# Altium PCB PCB0.1.PcbDoc
Units mm, origin at the board's own origin, x right, y up, seen from the top; angles counter-clockwise.
Board outline 50 x 160 mm, 2 copper layers (Top Layer, Bottom Layer); 25 components, 108 nets, 297 pads, 31 vias.
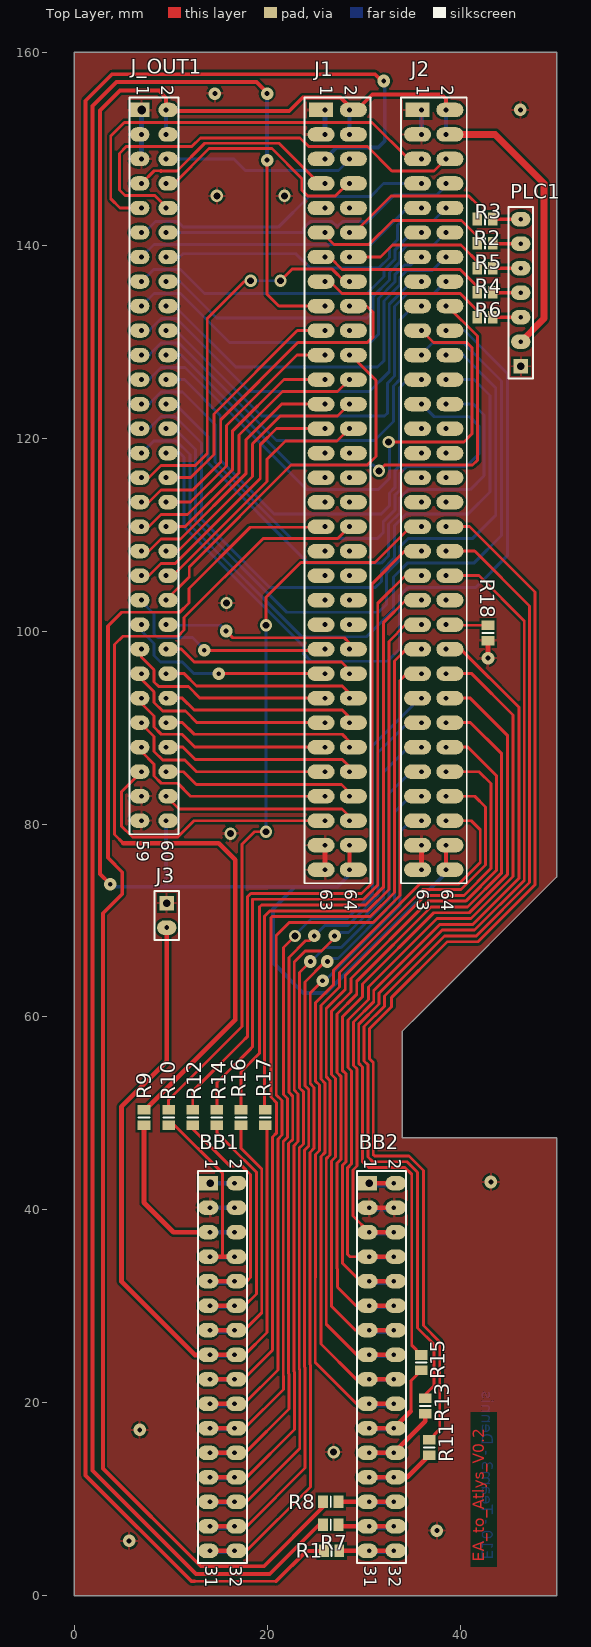
[diagram p0: Top Layer view]
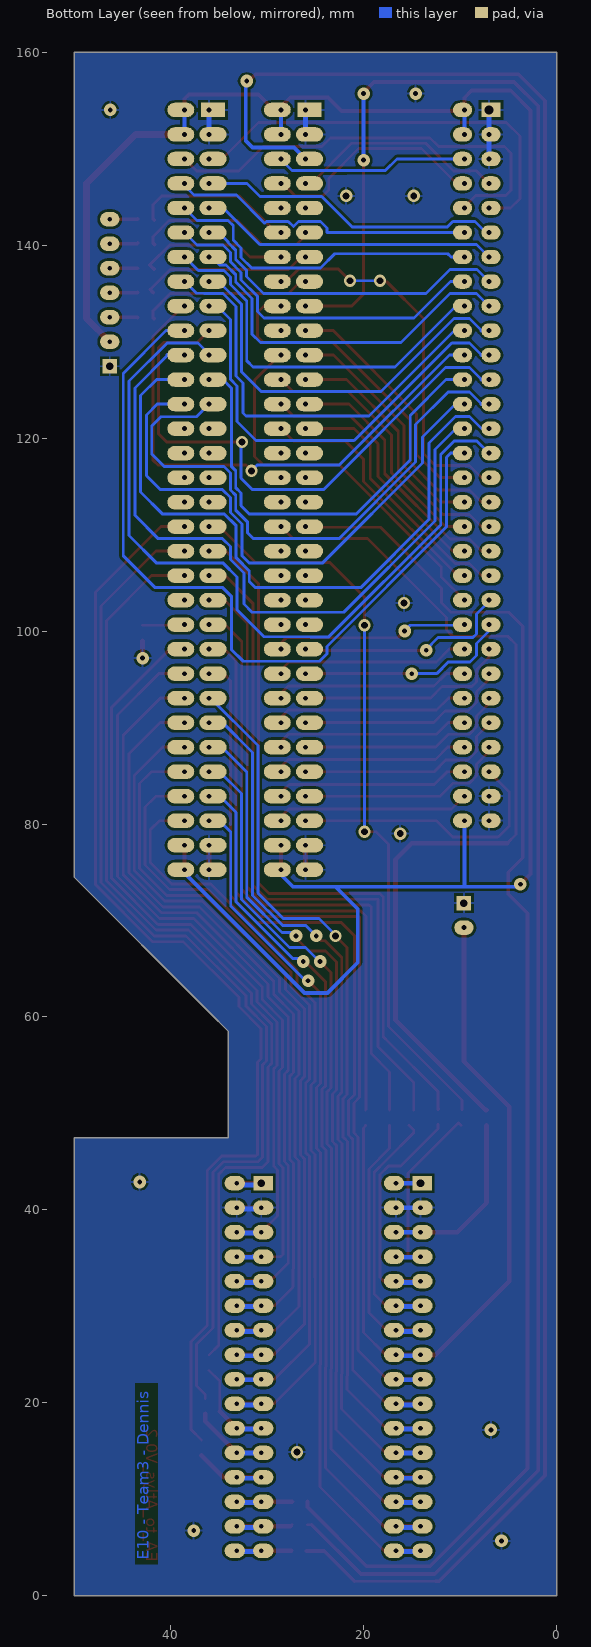
[diagram p1: Bottom Layer view, seen from below]

## Layer stack, top to bottom
Top Layer: signal copper 0.0356
Dielectric: dielectric 0.32, FR-4, Dk 4.8
Bottom Layer: signal copper 0.0356

## Board outline
0,0 0,160 50,160 50,74.5 36,60.5 34,58.5 34,47.5 50,47.5 50,0

## Design rules (kind name [scope] priority, off if disabled: settings)
Clearance Clearance_text [(InNet('GND') AND IsRegion) vs IsText] p1: gap=0
Clearance [All] p2: gap=0.254
PolygonConnect [All] p1: connectstyle=Relief reliefconductorwidth=0.254 reliefentries=4 polygonreliefangle="90 Angle"
RoutingVias [All] p1: holewidth=0.8 width=2 viastyle="Through Hole" minholewidth=0.711 minwidth=1.27 maxholewidth=0.711 maxwidth=1.27
SilkscreenOverComponentPads [All] p1: minsilkscreentomaskgap=0.254
SolderMaskExpansion [All] p1: expansion=0.102
Width Width_3V [InNet('+3V3')] p1: maxlimit=15 minlimit=0.4 preferedwidth=0.6 minimp=50.000000 maximp=50.000000 favimp=50.000000
Width Width_GND [InNet('GND')] p2: maxlimit=1.5 minlimit=0.5 preferedwidth=1 minimp=50.000000 maximp=50.000000 favimp=50.000000
Width [All] p3: maxlimit=1.5 minlimit=0.3 preferedwidth=0.5 minimp=50.000000 maximp=50.000000 favimp=50.000000
27 further rules are at their usual default settings.

## Components (designator, comment, footprint, x,y, rotation, side; value= is the part's Value field where it differs from the comment)
BB1 "Header 16X2" HDR2X16 14.1,42.775 r270 top
BB2 "Header 16X2" HDR2X16 30.6,42.775 r270 top
J1 "header 2x32" HDR2X32_special 26,154 r270 top
J2 "header 2x32" HDR2X32_special 36,154 r270 top
J3 "Header 2" HDR1X2 9.6,71.8 r270 top
J_OUT1 "Header 30X2" HDR2X30 7,154 r270 top
PLC1 "Header 7" HDR1X7 46.3,127.44 r90 top
R1 "Res1" 6-0805_L 26.7,4.675 r180 top
R2 "Res1" 6-0805_L 42.6,140.2 r180 top
R3 "Res1" 6-0805_L 42.6,142.7 r0 top
R4 "Res1" 6-0805_L 42.6,135.1 r180 top
R5 "Res1" 6-0805_L 42.6,137.6 r0 top
R6 "Res1" 6-0805_L 42.6,132.5 r180 top
R7 "Res1" 6-0805_L 26.6,7.375 r180 top
R8 "Res1" 6-0805_L 26.6,9.775 r180 top
R9 "Res1" 6-0805_L 7.25,49.575 r270 top
R10 "Res1" 6-0805_L 9.8,49.575 r90 top
R11 "Res1" 6-0805_L 36.8,15.375 r270 top
R12 "Res1" 6-0805_L 12.3,49.575 r90 top
R13 "Res1" 6-0805_L 36.4,19.675 r270 top
R14 "Res1" 6-0805_L 14.8,49.575 r90 top
R15 "Res1" 6-0805_L 36,24.175 r270 top
R16 "Res1" 6-0805_L 17.3,49.575 r90 top
R17 "Res1" 6-0805_L 19.8,49.575 r90 top
R18 "Res1" 6-0805_L 42.9,99.8 r270 top

## Footprints (in the part's own frame and the unit in brackets; to place one, negate y for a bottom-side part, rotate by r counter-clockwise, add the part's x,y. Pads: shape width x height; smd on the part's side, far side on the other; paste and mask are expansions set on the pad)
6-0805_L [mm] "Chip Resistor, Body 2.0x1.2mm, IPC High Density"
  rect 1x1.3 smd: 1(-0.8,0) 2(0.8,0)
  silkscreen extent 0,-0.55 0,0.55, body extent -1.07,-0.7 1.07,0.7, height 0.7
HDR1X2 [mm] "Connector; Header; 2 Position"
  rect 1.5x1.5 hole 0.8: 1(0,0)
  oval 1.5x2 hole 0.5: 2(2.54,0)
  silkscreen extent -1.27,-1.27 3.81,1.27
HDR1X7 [mm] "Connector; Header; 7 Position"
  rect 1.5x1.5 hole 0.8: 1(0,0)
  oval 1.5x2 hole 0.5: 2(2.54,0) 3(5.08,0) 4(7.62,0) 5(10.16,0) 6(12.7,0) 7(15.24,0)
  silkscreen extent -1.27,-1.27 16.51,1.27
HDR2X16 [mm] "Connector; Header; 16x2 Position"
  rect 1.5x2 hole 0.8 copper offset 0,-0.2: 1(0,0)
  oval 1.5x2.1 hole 0.5 copper offset 0,0.2: 2(0,2.54) 4(2.54,2.54) 6(5.08,2.54) 8(7.62,2.54) 10(10.16,2.54) 12(12.7,2.54) 14(15.24,2.54) 16(17.78,2.54) 18(20.32,2.54) 20(22.86,2.54) 22(25.4,2.54) 24(27.94,2.54) 26(30.48,2.54) 28(33.02,2.54) 30(35.56,2.54) 32(38.1,2.54)
  oval 1.5x2.1 hole 0.5 copper offset 0,-0.2: 3(2.54,0) 5(5.08,0) 7(7.62,0) 9(10.16,0) 11(12.7,0) 13(15.24,0) 15(17.78,0) 17(20.32,0) 19(22.86,0) 21(25.4,0) 23(27.94,0) 25(30.48,0) 27(33.02,0) 29(35.56,0) 31(38.1,0)
  silkscreen extent -1.27,-1.27 39.37,3.81
HDR2X30 [mm] "Connector; Header; 30x2 Position"
  rect 1.5x2 hole 0.9 copper offset 0,-0.2: 1(0,0)
  oval 1.5x2 hole 0.5 copper offset 0,0.2: 2(0,2.54) 4(2.54,2.54) 6(5.08,2.54) 8(7.62,2.54) 10(10.16,2.54) 12(12.7,2.54) 14(15.24,2.54) 16(17.78,2.54) 18(20.32,2.54) 20(22.86,2.54) 22(25.4,2.54) 24(27.94,2.54) 26(30.48,2.54) 28(33.02,2.54) 30(35.56,2.54) 32(38.1,2.54) 34(40.64,2.54) 36(43.18,2.54) 38(45.72,2.54) 40(48.26,2.54) 42(50.8,2.54) 44(53.34,2.54) 46(55.88,2.54) 48(58.42,2.54) 50(60.96,2.54) 52(63.5,2.54) 54(66.04,2.54) 56(68.58,2.54) 58(71.12,2.54) 60(73.66,2.54)
  oval 1.5x2 hole 0.5 copper offset 0,-0.2: 3(2.54,0) 5(5.08,0) 7(7.62,0) 9(10.16,0) 11(12.7,0) 13(15.24,0) 15(17.78,0) 17(20.32,0) 19(22.86,0) 21(25.4,0) 23(27.94,0) 25(30.48,0) 27(33.02,0) 29(35.56,0) 31(38.1,0) 33(40.64,0) 35(43.18,0) 37(45.72,0) 39(48.26,0) 41(50.8,0) 43(53.34,0) 45(55.88,0) 47(58.42,0) 49(60.96,0) 51(63.5,0) 53(66.04,0) 55(68.58,0) 57(71.12,0) 59(73.66,0)
  silkscreen extent -1.27,-1.27 75.06,3.81
HDR2X32_special [mm]
  rect 1.5x2.5 hole 0.5 copper offset 0,-0.4: 1(0,0)
  oval 1.5x2.8 hole 0.5 copper offset 0,0.4: 2(0,2.54) 4(2.54,2.54) 6(5.08,2.54) 8(7.62,2.54) 10(10.16,2.54) 12(12.7,2.54) 14(15.24,2.54) 16(17.78,2.54) 18(20.32,2.54) 20(22.86,2.54) 22(25.4,2.54) 24(27.94,2.54) 26(30.48,2.54) 28(33.02,2.54) 30(35.56,2.54) 32(38.1,2.54) 34(40.64,2.54) 36(43.18,2.54) 38(45.72,2.54) 40(48.26,2.54) 42(50.8,2.54) 44(53.34,2.54) 46(55.88,2.54) 48(58.42,2.54) 50(60.96,2.54) 52(63.5,2.54) 54(66.04,2.54) 56(68.58,2.54) 58(71.12,2.54) 60(73.66,2.54) 62(76.2,2.54) 64(78.74,2.54)
  oval 1.5x2.8 hole 0.5 copper offset 0,-0.4: 3(2.54,0) 5(5.08,0) 7(7.62,0) 9(10.16,0) 11(12.7,0) 13(15.24,0) 15(17.78,0) 17(20.32,0) 19(22.86,0) 21(25.4,0) 23(27.94,0) 25(30.48,0) 27(33.02,0) 29(35.56,0) 31(38.1,0) 33(40.64,0) 35(43.18,0) 37(45.72,0) 39(48.26,0) 41(50.8,0) 43(53.34,0) 45(55.88,0) 47(58.42,0) 49(60.96,0) 51(63.5,0) 53(66.04,0) 55(68.58,0) 57(71.12,0) 59(73.66,0) 61(76.2,0) 63(78.74,0)
  silkscreen extent -1.27,-2.1 80.14,4.7

## Part data
BB1 BB2: "Header, 16-Pin, Dual row"
J3: "Header, 2-Pin"
J_OUT1: "Header, 30-Pin, Dual row"
PLC1: "Header, 7-Pin"
R1 R2 R3 R4 R5 R6 R7 R8 R9 R10 R11 R12 R13 R14 R15 R16 R17 R18: "Resistor"

## Via types
v1: diameter 1.3, hole 0.5, Top Layer to Bottom Layer, 19 vias
v2: diameter 1.27, hole 0.711, Top Layer to Bottom Layer, 12 vias

## Nets (pads, with @x,y where several pads share a name; then routed paths per layer and width w, separated by ;. In a path a pad name is that pad's centre, name@x,y a point inside that pad or via, vN(x,y) a via of type N, cw(c..) or ccw(c..) an arc to the next point about the centre after c; other vN are vias at no path point)
+3V3: J1.2 J1.4 J1.62 J1.64 J2.2 J2.4 J2.62 J2.64 J_OUT1.2 J_OUT1.4 J_OUT1.60 PLC1.2 | length 231.5
  Top Layer w0.4: v1(3.75,73.75) 2.7,74.8 2.7,153.95 4.75,156 8.8,156 9.54,155.26 J_OUT1.2 9.64,153.9 22.3,153.9 23.7,155.3 27.6,155.3 28.54,154.36 J1.2 29.3,154 30.9,155.6 38.1,155.6 38.54,155.16 J2.2 ; J1.64 J1.62 ; J2.64 J2.62
  Top Layer w0.7: J2.4 43.64,151.46 48.7,146.4 48.7,132.38 PLC1.2
  Bottom Layer w0.4: v1(3.75,73.75) 4,73.5 9.5,73.5 ; J_OUT1.60 9.54,73.54 9.5,73.5 ; J_OUT1.4 J_OUT1.2 ; 22.85,73.45 20.6,71.2 20.6,65.65 23.75,62.5 26.105,62.5 38.54,74.935 J2.64 ; 27.302,73.5 9.5,73.5 ; 27.302,73.502 28.54,74.74 J1.64 28.51,75.26 J1.64@28.07,74.82 ; J1.4 J1.2 ; J2.4 J2.2
A1: BB1.13 BB1.14 R16.1 | length 28.5
  Top Layer w0.3: BB1.14 17.635,27.535 19.446,29.346 19.446,44.254 17.3,46.4 R16.1
  Top Layer w0.5: BB1.13 BB1.14
  Bottom Layer w0.5: BB1.13 14.365,27.535 14.5,27.4 16,27.4 BB1.14@16.1,27.3
A2: BB2.21 BB2.22 R15.2 | length 11.6
  Top Layer w0.3: 34.9,19.135 34.9,22.275 R15.2
  Top Layer w0.5: BB2.21 BB2.22 34.9,19.135
  Bottom Layer w0.5: BB2.21 30.925,17.375 31,17.3 BB2.22@32.465,17.3
A3: BB1.11 BB1.12 R14.1 | length 26.4
  Top Layer w0.3: R14.1@15.3,48.775 14.8,48.275 14.8,48 17.625,45.175 17.634,45.175 18.892,43.917 18.892,31.292 17.675,30.075 BB1.12
  Top Layer w0.5: BB1.11 BB1.12
  Bottom Layer w0.5: BB1.11@14.7,30 15.965,30 BB1.12@16.265,29.7
A4: BB2.23 BB2.24 R13.2 | length 9.7
  Top Layer w0.5: BB2.23 BB2.24 36.4,18.095 R13.2
  Bottom Layer w0.5: BB2.23 30.765,14.835 30.8,14.8 BB2.24@32.405,14.8
A5: BB1.9 BB1.10 R12.1 | length 25.4
  Top Layer w0.3: R12.1@12.3,48.901 R12.1 12.3,48.4 16.125,44.575 17.386,44.575 18.3,43.661 18.3,33 17.915,32.615 BB1.10
  Top Layer w0.5: BB1.9 BB1.10
  Bottom Layer w0.5: BB1.9 14.585,32.615 14.7,32.5 BB1.10@15.925,32.5
A6: BB2.25 BB2.26 R11.2 | length 9.1
  Top Layer w0.5: BB2.25 BB2.26 34.52,12.295 R11.2
  Bottom Layer w0.5: BB2.25 30.905,12.295 31,12.2 BB2.26@32.545,12.2
A7: BB1.7 BB1.8 R10.1 | length 21
  Top Layer w0.3: R10.1@9.9,48.775 10.163,49.037 15.4,43.8 15.386,43.786 15.386,35.155 ; BB1.8 BB1.8@16.98,35.155
  Top Layer w0.5: BB1.7 BB1.8
  Bottom Layer w0.5: BB1.7@14.6,35.1 16.1,35.1 BB1.8@16.2,35
ABUF_EN: J2.44 R18.1 | length 4.4
  Top Layer w0.3: J2.44 38.6,100.6 R18.1
CS2: BB1.15 BB1.16 J3.2 R17.1 | length 81.1
  Top Layer w0.3: BB1.15@14.08,24.975 BB1.15 ; BB1.16 17.695,24.995 20,27.3 20,48.5 19.8,48.7 R17.1
  Top Layer w0.5: J3.2 9.6,55.4 4.9,50.7 4.9,32.6 12.525,24.975 BB1.15@14.08,24.975 ; BB1.15 BB1.16
  Bottom Layer w0.5: BB1.15@14.6,24.9 BB1.16@16.345,24.9
D0: BB2.19 BB2.20 J2.60 | length 80.8
  Top Layer w0.3: BB2.19 29.285,19.915 25,24.2 25,32.998 25.03,33.028 25.03,45.762 25.432,46.164 25.432,52.936 25.03,53.338 25.03,61.476 26.9,63.346 26.9,64.849 35.851,73.8 39.9,73.8 42.1,76 42.1,79.4 41.16,80.34 J2.60
  Top Layer w0.5: BB2.19 BB2.20
  Bottom Layer w0.5: BB2.19 30.715,19.8 BB2.20@32.525,19.8
D1: BB1.31 BB1.32 J2.59 | length 90.6
  Top Layer w0.3: BB1.32 17.875,4.675 24.5,11.3 24.5,23.917 24.446,23.971 24.446,45.962 24.878,46.394 24.878,52.706 24.476,53.108 24.476,62.476 v1(25.75,63.75)
  Top Layer w0.5: BB1.31 BB1.32
  Bottom Layer w0.3: v1(25.75,63.75) 26,63.75 33.762,71.512 33.762,79.162 34.94,80.34 J2.59
  Bottom Layer w0.5: BB1.31 14.175,4.6 16.5,4.6 BB1.32@16.575,4.675
D2: BB2.17 BB2.18 J2.58 | length 81.4
  Top Layer w0.3: BB2.17 29.245,22.455 25.584,26.116 25.584,45.533 25.986,45.935 25.986,53.165 25.584,53.567 25.584,61.181 27.5,63.097 27.5,64.6 36.1,73.2 40.1,73.2 42.654,75.754 42.654,81.746 41.52,82.88 J2.58
  Top Layer w0.5: BB2.17 BB2.18
  Bottom Layer w0.5: BB2.17 31.145,22.455 31.2,22.4 32.685,22.4 BB2.18@32.885,22.2
D3: BB1.29 BB1.30 J2.57 | length 90.2
  Top Layer w0.3: BB1.30 17.915,7.215 23.946,13.246 23.946,23.687 23.892,23.741 23.892,46.191 24.324,46.623 24.324,52.477 23.922,52.879 23.922,63.638 26.034,65.75 v1(26.25,65.75)
  Top Layer w0.5: BB1.29 BB1.30
  Bottom Layer w0.3: v1@26.325,66.075 27.342,66.075 33.208,71.941 33.208,81.208 34.88,82.88 J2.57
  Bottom Layer w0.5: BB1.29 14.215,7.1 BB1.30@15.925,7.1
D4: BB2.15 BB2.16 J2.56 | length 81.3
  Top Layer w0.3: BB2.15 29.305,24.995 26.138,28.162 26.138,45.303 26.54,45.705 26.54,53.395 26.138,53.797 26.138,60.887 28.1,62.849 28.1,64.3 36.4,72.6 40.4,72.6 43.208,75.408 43.208,84.192 41.98,85.42 J2.56 ; BB2.16 BB2.16@33.22,24.995
  Top Layer w0.5: BB2.15 BB2.16
  Bottom Layer w0.5: BB2.15 30.905,24.995 31,24.9 BB2.16@32.545,24.9
D5: BB1.27 BB1.28 J2.55 | length 91.4
  Top Layer w0.3: BB1.28 17.855,9.755 23.392,15.292 23.392,23.458 23.338,23.512 23.338,46.421 23.77,46.853 23.77,52.247 23.368,52.649 23.368,64.618 v1(24.5,65.75)
  Top Layer w0.5: BB1.27 BB1.28
  Bottom Layer w0.3: v1(24.5,65.75) 24.55,65.75 26,67.2 27.683,67.2 32.654,72.171 32.654,83.154 34.92,85.42 J2.55
  Bottom Layer w0.5: BB1.27 14.245,9.755 14.3,9.7 16.185,9.7 BB1.28@16.385,9.5
D6: BB2.13 BB2.14 J2.54 | length 80.7
  Top Layer w0.3: BB2.13 29.165,27.535 26.7,30 26.7,33.708 26.692,33.716 26.692,45.074 27.094,45.476 27.094,53.624 26.692,54.026 26.692,60.592 28.7,62.6 28.7,64 36.7,72 40.583,72 43.762,75.179 43.762,85.038 40.84,87.96 J2.54
  Top Layer w0.5: BB2.13 BB2.14
  Bottom Layer w0.5: BB2.13 30.735,27.4 BB2.14@32.605,27.4
D7: BB1.25 BB1.26 J2.53 | length 92.3
  Top Layer w0.3: BB1.26 17.895,12.295 22.838,17.238 22.838,23.228 22.784,23.282 22.784,46.65 23.216,47.082 23.216,52.018 22.814,52.42 22.814,65.714 23.949,66.849 25.649,66.849 27,68.2 v1(27,68.4)
  Top Layer w0.5: BB1.25 BB1.26
  Bottom Layer w0.3: v1(27,68.4) 27.35,68.75 28.45,68.75 32.1,72.4 32.1,85.4 34.66,87.96 J2.53
  Bottom Layer w0.5: BB1.25 14.1,12.1 14.2,12.2 15.945,12.2 BB1.26@16.245,11.9
D8: BB2.11 BB2.12 J2.52 | length 81.9
  Top Layer w0.3: BB2.11 29.225,30.075 27.3,32 27.3,33.892 27.246,33.946 27.246,44.844 27.648,45.246 27.648,53.854 27.246,54.256 27.246,60.295 29.3,62.349 29.3,63.7 37,71.4 40.767,71.4 44.316,74.949 44.316,87.284 41.1,90.5 J2.52 J2.52@38.54,90.36 ; BB2.12 33.2,30.135 BB2.12@33.2,30.675
  Top Layer w0.5: BB2.11 BB2.12
  Bottom Layer w0.5: BB2.11 31.125,30.075 31.125,30 32.815,30 BB2.12@32.94,29.875
D9: BB1.23 BB1.24 J2.51 | length 92.2
  Top Layer w0.3: BB1.24 17.735,14.835 22.284,19.384 22.284,22.999 22.23,23.053 22.23,46.88 22.662,47.312 22.662,51.788 22.26,52.19 22.26,66.16 24,67.9 24.4,67.9 v1(24.9,68.4)
  Top Layer w0.5: BB1.23 BB1.24
  Bottom Layer w0.3: v1(24.9,68.4) 26,69.5 28.4,69.5 31.5,72.6 31.5,87.4 34.6,90.5 J2.51
  Bottom Layer w0.5: BB1.23 14.1,14.7 14.2,14.8 16.005,14.8 BB1.24@16.305,14.5
D10: BB2.9 BB2.10 J2.50 | length 80.4
  Top Layer w0.3: BB2.9 29.685,32.615 27.8,34.5 27.8,44.615 28.202,45.017 28.202,54.083 27.8,54.485 27.8,60 29.9,62.1 29.9,63.419 37.281,70.8 40.95,70.8 44.9,74.75 44.9,89.2 41.06,93.04 J2.50
  Top Layer w0.5: BB2.9 BB2.10
  Bottom Layer w0.5: BB2.9 31.085,32.615 31.2,32.5 BB2.10@32.625,32.5
D11: BB1.21 BB1.22 J2.49 | length 90.9
  Top Layer w0.3: BB1.22 17.675,17.375 21.7,21.4 21.7,22.799 21.676,22.823 21.676,47.109 22.108,47.541 22.108,51.559 21.7,51.967 21.7,67.2 v2(22.9,68.4)
  Top Layer w0.5: BB1.21 BB1.22
  Bottom Layer w0.3: v2@22.85,68.45 24.6,70.2 28.317,70.2 30.946,72.829 30.946,88.128 35.858,93.04 J2.49
  Bottom Layer w0.5: BB1.21@14.7,17.3 BB1.22@16.165,17.3
D12: BB2.7 BB2.8 J2.48 | length 81.4
  Top Layer w0.3: BB2.7 28.599,35.155 28.354,35.4 28.354,44.385 28.756,44.787 28.756,54.398 28.4,54.754 28.4,59.7 30.5,61.8 30.5,63.1 37.6,70.2 41.134,70.2 45.5,74.566 45.5,91.3 41.22,95.58 J2.48
  Top Layer w0.5: BB2.7 BB2.8
  Bottom Layer w0.5: BB2.7 31.445,35.155 31.5,35.1 32.685,35.1 BB2.8@32.885,34.9
D13: BB1.19 BB1.20 J2.47 | length 95
  Top Layer w0.3: BB1.20 16.7,19.975 17.675,19.975 21.122,23.422 21.122,47.339 21.554,47.771 21.554,51.329 20.954,51.929 20.954,68.454 22.3,69.8 31,69.8 33.775,72.575 33.775,94.875 34.48,95.58 J2.47
  Top Layer w0.5: BB1.19 BB1.20
  Bottom Layer w0.5: BB1.19 14.485,19.915 14.6,19.8 BB1.20@15.8,19.8
D14: BB2.5 BB2.6 J2.46 | length 79.5
  Top Layer w0.3: BB2.5 28.908,39.387 28.908,44.156 29.31,44.558 29.31,54.627 28.954,54.983 28.954,59.471 31.054,61.571 31.054,62.754 37.9,69.6 41.317,69.6 46.1,74.383 46.1,92.1 40.08,98.12 J2.46
  Top Layer w0.5: BB2.5 BB2.6
  Bottom Layer w0.5: BB2.5 31.205,37.695 31.3,37.6 32.645,37.6 BB2.6@32.845,37.4
D15: BB1.17 BB1.18 J2.45 | length 95.9
  Top Layer w0.3: BB1.18 17.555,22.455 20.568,25.468 20.568,47.568 21,48 21,51.1 20.4,51.7 20.4,70.3 20.5,70.4 30.7,70.4 33.2,72.9 33.2,96.9 34.42,98.12 J2.45
  Top Layer w0.5: BB1.17 BB1.18
  Bottom Layer w0.5: BB1.17@14.7,22.3 14.8,22.4 15.985,22.4 BB1.18@16.285,22.1
DBUS_EN: J2.43 R17.2 | length 63.9
  Top Layer w0.3: 19.746,51.429 19.754,51.437 19.754,70.454 20.3,71 30.4,71 32.625,73.225 32.625,98.925 34.36,100.66 J2.43 ; 19.75,51.425 19.75,50.425 R17.2
GND: BB1.3 BB1.4 BB2.3 BB2.4 J1.1 J1.3 J1.61 J1.63 J2.1 J2.3 J2.61 J2.63 J3.1 J_OUT1.1 J_OUT1.3 J_OUT1.5 J_OUT1.57 J_OUT1.59 PLC1.1 R18.2 | length 24.9
  Top Layer w0.5: J1.63 J1.61 ; BB2.3 BB2.4 ; J2.63 J2.61 ; v1@42.9,96.8 R18.2
  Bottom Layer w0.5: J_OUT1.5 J_OUT1.3 J_OUT1.1 ; BB1.3 BB1.4 ; J1.3 J1.1 ; BB2.3 31.165,40.235 31.3,40.1 32.605,40.1 BB2.4@32.805,39.9 ; J2.3 J2.1
  other v1: 5.7,5.7 37.6,6.775 6.8,17.2 43.2,42.9 42.9,97.2 46.25,154 14.6,155.7
  other v2: 26.9,14.9 16.2,79 15.8,102.9 14.8,145.1 21.8,145.1
HDI: PLC1.6 R2.1 | length 2.9
  Top Layer w0.4: R2.1 43.46,140.14 PLC1.6
HDO: PLC1.7 R3.2 | length 2.9
  Top Layer w0.4: R3.2 43.42,142.68 PLC1.7
INT: BB2.29 BB2.30 R7.1 | length 7.7
  Top Layer w0.3: R7.1 R7.1@27.56,7.215
  Top Layer w0.5: R7.1@27.56,7.215 BB2.29 BB2.30
  Bottom Layer w0.5: BB2.29 30.785,7.215 30.9,7.1 BB2.30@32.425,7.1
NetJ1_5: J1.5 R1.2 | length 218.4
  Top Layer w0.3: 12.475,1.525 20.925,1.525
  Top Layer w0.4: 12.475,1.525 12.175,1.525 1.2,12.5 1.2,154.95 3.95,157.7 31.2,157.7 v1@32.2,156.7 ; 20.925,1.525 24.075,4.675 R1.2
  Bottom Layer w0.4: J1.5 27.204,150.124 31.524,150.124 32.2,150.8 v1@32.2,156.7
  other v1: 32.1,157
NetJ1_11: J1.11 R2.2 | length 19.1
  Top Layer w0.3: J1.11@25.984,141.316 J1.11 ; J1.11@26,141 26.95,140.05 30.55,140.05 33.05,142.55 40.15,142.55 41.8,140.9 R2.2
  Top Layer w0.4: J1.11@26,141 J1.11 ; R2.2@41.65,140.05 R2.2
NetJ1_12: J1.12 R3.1 | length 16.9
  Top Layer w0.3: J1.12@29.05,141.3 32.84,145.09 40.91,145.09 41.8,144.2 R3.1
  Top Layer w0.4: J1.12 J1.12@29.05,141.3 ; R3.1@41.69,142.59 R3.1
NetJ1_13: J1.13 R4.2 | length 18
  Top Layer w0.3: J1.13@25.94,138.7 J1.13 ; J1.13@26.49,138.76 27.78,137.47 40.03,137.47 R4.2@42.1,135.4
  Top Layer w0.4: J1.13 J1.13@26.49,138.76 ; R4.2 R4.2@42.1,135.4
NetJ1_14: J1.14 R5.1 | length 15.6
  Top Layer w0.3: J1.14 31.76,138.76 33.01,140.01 40.09,140.01 R5.1@42.15,137.95
  Top Layer w0.4: R5.1@41.7,137.5 R5.1 R5.1@42.15,137.95
NetJ1_15: J1.15 R6.2 | length 17.9
  Top Layer w0.3: J1.15@26.53,136.22 27.78,134.97 40.03,134.97 41.8,133.2 R6.2
  Top Layer w0.4: J1.15 J1.15@26.53,136.22 ; R6.2@41.7,132.4 R6.2
NetJ1_17: J1.17 R7.2 | length 219
  Top Layer w0.3: v1@20,148.5 20,134.9 21.22,133.68 J1.17 ; R7.2@25.375,7.375 R7.2
  Top Layer w0.4: v1@20.1,155.8 20,155.8 18.9,156.9 4.4,156.9 1.9,154.4 1.9,13 12.625,2.275 20.275,2.275 R7.2@25.375,7.375
  Bottom Layer w0.3: J1.17@25.92,133.68 J1.17
  Bottom Layer w0.4: v1@19.951,155.7 20,155.651 v1@20,148.5
  other v1: 20,148.8 20,155.7
NetJ1_35: J1.35 R8.2 | length 146.5
  Top Layer w0.3: 3.5,100.5 4.95,101.95 10.95,101.95 11.9,102.9 11.9,104.4 18.255,110.755 25.935,110.755 J1.35
  Top Layer w0.4: 3.5,100.5 3.5,76.5 5,75 5,72.75 3,70.75 3,13.2 13.125,3.075 19.675,3.075 25.8,9.2 R8.2
NetJ1_36: J1.36 R9.1 | length 93.4
  Top Layer w0.3: 5.1,78 4.2,78.9 4.2,98.6 5.06,99.46 10.76,99.46 11.4,100.1 11.4,101.4 19.6,109.6 27.32,109.6 J1.36
  Top Layer w0.5: 5.1,78 15,78 16.7,76.3 16.7,59.7 7.375,50.375 R9.1
NetJ2_35: J2.35 R10.2 | length 77.2
  Top Layer w0.3: R10.2 9.8,51.4 17.4,59 17.4,77.9 18.7,79.2 v2(19.9,79.2) ; v2@19.9,100.5 v2(19.9,100.6) 19.9,103.5 23.5,107.1 31.2,107.1 34.92,110.82 J2.35
  Bottom Layer w0.3: v2(19.9,79.2) v2(19.9,100.6)
NetJ2_36: J2.36 R11.1 | length 114.4
  Top Layer w0.3: R11.1 37.9,17.275 37.9,26.324 36.2,28.024 36.2,44.1 34.7,45.6 31.129,45.6 31.008,45.721 31.008,55.28 30.616,55.672 30.616,58.782 32.915,61.081 32.915,62.04 38.644,67.769 ; J2.36 40.98,110.82 47.762,104.038 47.762,73.694 41.868,67.8 38.7,67.8
NetJ2_37: J2.37 R12.2 | length 75.6
  Top Layer w0.3: R12.2@12.2,50.475 R12.2 12.3,52.3 17.4,57.4 17.954,57.954 17.954,72.429 18.321,72.796 20.096,72.796 20.1,72.8 29.8,72.8 30.9,73.9 30.9,104.9 34.28,108.28 J2.37
NetJ2_38: J2.38 R13.1 | length 107.6
  Top Layer w0.3: R13.1 36.4,20.875 37.3,21.775 37.3,26.075 35.6,27.775 35.6,43.9 34.5,45 30.946,45 30.454,45.492 30.454,55.05 30.062,55.442 30.062,59.012 32.162,61.112 32.162,62.165 38.397,68.4 41.684,68.4 47.208,73.924 47.208,102.592 41.52,108.28 J2.38
NetJ2_39: J2.39 R14.2 | length 71.9
  Top Layer w0.3: R14.2 14.8,53.2 18.2,56.6 18.508,56.908 18.508,72.2 30,72.2 31.475,73.675 31.475,102.875 34.34,105.74 J2.39
NetJ2_40: J2.40 R15.1 | length 100.1
  Top Layer w0.3: R15.1 35,25.975 35,43.7 34.3,44.4 30.5,44.4 29.9,45 29.9,54.821 29.508,55.213 29.508,59.241 31.608,61.341 31.608,62.459 38.149,69 41.501,69 46.654,74.153 46.654,101.046 41.96,105.74 J2.40
NetJ2_41: J2.41 R16.2 | length 67.8
  Top Layer w0.3: R16.2 17.3,54.3 19.2,56.2 19.2,71.384 19.416,71.6 30.2,71.6 32.05,73.45 32.05,100.85 34.4,103.2 J2.41
NRESET: PLC1.4 R4.1 | length 2.9
  Top Layer w0.4: R4.1 43.44,135.06 PLC1.4
NSLEEP: PLC1.3 R6.1 | length 2.9
  Top Layer w0.4: R6.1 43.42,132.52 PLC1.3
OE: BB1.5 BB1.6 R9.2 | length 18.7
  Top Layer w0.5: R9.2 7.25,40.75 10.305,37.695 BB1.5
  Bottom Layer w0.5: BB1.5 BB1.6
P0.6: J2.15 J_OUT1.19 | length 41.5
  Bottom Layer w0.3: J_OUT1.19@7.772,131.14 9.022,132.39 10.61,132.39 18.19,124.81 30.61,124.81 32.662,126.862 32.662,133.862 J2.15@35.02,136.22
  Bottom Layer w0.4: J_OUT1.19 J_OUT1.19@7.772,131.14 ; J2.15@35.02,136.22 J2.15
P0.8: J2.16 J_OUT1.20 | length 44.4
  Bottom Layer w0.3: J_OUT1.20 10.56,131.14 19.43,122.27 32.17,122.27 32.5,122.6 32.5,125.712 33.216,126.428 33.216,133.616 34.57,134.97 36.518,134.97 ; 36.548,135 37.32,135 J2.16
P0.14: J2.17 J_OUT1.21 | length 45.3
  Bottom Layer w0.3: J_OUT1.21@7.772,128.6 9.022,129.85 10.85,129.85 20.97,119.73 31.13,119.73 33.1,121.7 33.1,125.4 33.796,126.096 33.796,132.296 J2.17@35.18,133.68
  Bottom Layer w0.4: J_OUT1.21 J_OUT1.21@7.772,128.6 ; J2.17@35.18,133.68 J2.17
P0.16: J2.18 J_OUT1.22 | length 55.2
  Top Layer w0.3: v2(31.6,116.6) 32.19,117.19 41.29,117.19 41.8,117.7 41.8,130.562 38.682,133.68 J2.18
  Bottom Layer w0.3: J_OUT1.22 11.1,128.6 22.51,117.19 31.01,117.19 v2(31.6,116.6)
  Bottom Layer w0.4: J2.18@38.54,133.54 J2.18
P0.20: J1.16 J_OUT1.31 | length 39.2
  Top Layer w0.3: J_OUT1.31 7.772,115.9 9.022,117.15 12.567,117.15 13.8,118.383 13.8,132.4 17.6,136.2 18.2,136.2 v2(18.3,136.3) ; v2(21.4,136.3) 22.6,137.5 26.75,137.5 J1.16@28.03,136.22
  Top Layer w0.4: J1.16@28.03,136.22 J1.16
  Bottom Layer w0.3: v2(18.3,136.3) v2(21.4,136.3)
P0.24: J1.18 J_OUT1.33 | length 38.9
  Top Layer w0.3: J_OUT1.33 7.772,113.36 9.022,114.61 12.31,114.61 15.2,117.5 15.2,121.9 23.19,129.89 30.39,129.89 31,130.5 31,133 30.32,133.68 J1.18
P0.26: J1.19 J_OUT1.32 | length 25.2
  Top Layer w0.3: J_OUT1.32 12.1,115.9 14.5,118.3 14.5,122.5 23.14,131.14 J1.19
P1.0: J2.22 J_OUT1.28 | length 73
  Bottom Layer w0.3: J_OUT1.28 10.42,120.98 12.6,118.8 12.6,111.4 22.05,101.95 31.55,101.95 32.4,102.8 32.4,106 33.796,107.396 33.796,108.758 34.608,109.57 41.27,109.57 43.7,112 43.7,125.2 J2.22@40.3,128.6
  Bottom Layer w0.4: J2.22 J2.22@40.3,128.6
P1.3: J1.21 J_OUT1.34 | length 25.3
  Top Layer w0.3: J_OUT1.34 12.06,113.36 15.8,117.1 15.8,121.3 23.1,128.6 J1.21
  Top Layer w0.4: J1.21@26,128.56 J1.21
P1.4: J2.23 J_OUT1.24 | length 47.3
  Bottom Layer w0.3: J_OUT1.24 11.44,126.06 15.154,122.346 15.154,117.729 20.773,112.11 31.81,112.11 32.688,112.988 32.688,114.297 33.242,114.851 33.242,116.607 33.7,117.065 33.7,125.2 J2.23@34.56,126.06
  Bottom Layer w0.4: J2.23@34.56,126.06 J2.23
P1.6: J1.22 J_OUT1.42 | length 41
  Top Layer w0.3: J_OUT1.42@10.3,103.2 J_OUT1.42 11.942,105.602 11.942,106.642 22.49,117.19 30.39,117.19 31.3,118.1 31.3,125.982 28.682,128.6 J1.22
P1.9: J2.24 J_OUT1.27 | length 70.5
  Bottom Layer w0.3: J_OUT1.27 7.772,120.98 9.022,122.23 10.47,122.23 13.2,119.5 13.2,111.583 20.293,104.49 31.19,104.49 31.846,105.146 31.846,106.229 33.2,107.583 33.2,110.917 34.393,112.11 40.81,112.11 43.1,114.4 43.1,124.4 41.44,126.06 J2.24
P1.11: J1.23 J_OUT1.35 | length 27.7
  Top Layer w0.3: J_OUT1.35 7.772,110.82 9.022,112.07 11.77,112.07 16.4,116.7 16.4,120.7 21.76,126.06 J1.23
P1.13: J1.24 J_OUT1.36 | length 27.6
  Top Layer w0.3: J_OUT1.36 11.52,110.82 17.1,116.4 17.1,120.3 21.61,124.81 27.3,124.81 27.3,124.82 J1.24
P1.14: J2.25 J_OUT1.25 | length 61.3
  Bottom Layer w0.3: J_OUT1.25@7.772,123.52 9.022,124.77 11.23,124.77 14.6,121.4 14.6,117.5 22.53,109.57 31.416,109.57 32.046,110.2 32.046,111.329 33.242,112.525 33.242,114.067 33.796,114.621 33.796,116.378 34.472,117.054 40.654,117.054 41.946,118.346 41.946,121.254 41,122.2 37.32,122.2 J2.25
  Bottom Layer w0.4: J_OUT1.25 J_OUT1.25@7.772,123.52 ; J2.25@34.77,123.52 J2.25
P1.16: J2.26 J_OUT1.26 | length 58.7
  Bottom Layer w0.3: J_OUT1.26 10.48,123.52 13.9,120.1 13.9,117.4 24.27,107.03 31.83,107.03 32.6,107.8 32.6,111.1 33.796,112.296 33.796,113.838 34.608,114.65 41.05,114.65 42.5,116.1 42.5,122.4 41.38,123.52 J2.26
P1.19: J1.25 J_OUT1.37 | length 27.7
  Top Layer w0.3: J_OUT1.37@6.9,108.3 J_OUT1.37@6.9,108.6 ; J_OUT1.37 7.772,108.28 9.022,109.53 11.03,109.53 17.8,116.3 17.8,119.8 21.52,123.52 J1.25
P1.21: J1.26 J_OUT1.38 | length 27.6
  Top Layer w0.3: J_OUT1.38 10.78,108.28 18.5,116 18.5,119.4 21.37,122.27 27.29,122.27 J1.26
  Top Layer w0.4: J1.26@28.54,123.19 J1.26
P1.23: J1.27 J_OUT1.39 | length 27.4
  Top Layer w0.3: J_OUT1.39 7.772,105.74 9.022,106.99 10.49,106.99 19.3,115.8 19.3,119.3 20.98,120.98 J1.27
P1.25: J1.28 J_OUT1.40 | length 26.7
  Top Layer w0.3: J_OUT1.40 10.24,105.74 20,115.5 20,117.8 21.9,119.7 27.26,119.7 J1.28
P1.27: J2.19 J_OUT1.23 | length 59.6
  Top Layer w0.3: v2(32.6,119.6) 40.4,119.6 41.246,120.446 41.246,129.354 40.7,129.9 37.24,129.9 J2.19
  Bottom Layer w0.3: J_OUT1.23@7.772,126.06 9.022,127.31 11.49,127.31 24.15,114.65 31.5,114.65 32.688,115.838 32.688,116.849 32.7,116.861 32.7,119.5 v2(32.6,119.6)
  Bottom Layer w0.4: J_OUT1.23 J_OUT1.23@7.772,126.06
P1.29: J2.20 J_OUT1.30 | length 83.8
  Bottom Layer w0.3: J_OUT1.30 10.96,118.44 11.4,118 11.4,110.8 23.796,98.404 23.796,97.642 24.568,96.87 32.47,96.87 33.7,98.1 33.7,103.6 34.59,104.49 41.59,104.49 44.9,107.8 44.9,126.7 40.46,131.14 J2.20
P1.31: J2.21 J_OUT1.29 | length 83.4
  Bottom Layer w0.3: J_OUT1.29 8.26,119.7 10.6,119.7 12,118.3 12,111 23.6,99.4 25.472,99.4 25.482,99.41 30.31,99.41 33.1,102.2 33.1,105.6 34.53,107.03 41.43,107.03 44.3,109.9 44.3,125.9 40.35,129.85 37.15,129.85 J2.21@36,128.7
  Bottom Layer w0.4: J2.21 J2.21@36,128.7
P2.0: J2.5 J_OUT1.9 | length 44.5
  Top Layer w0.3: J_OUT1.9 4.76,143.84 3.8,144.8 3.8,151.3 5.21,152.71 30.89,152.71 34.68,148.92 J2.5
P2.1: J2.6 J_OUT1.10 | length 45.9
  Top Layer w0.3: J_OUT1.10@9.54,143.96 8.37,145.13 5.27,145.13 4.7,145.7 4.7,149.5 5.4,150.2 12.2,150.2 13.1,151.1 23.425,151.1 24.325,150.2 30.4,150.2 32.93,147.67 37.29,147.67 J2.6
  Top Layer w0.4: J_OUT1.10 J_OUT1.10@9.54,143.96
P2.2: J2.7 J_OUT1.11 | length 31.6
  Bottom Layer w0.3: J_OUT1.11 7.3,141.3 8.454,142.454 10.746,142.454 11.346,141.854 21.154,141.854 24.34,145.04 30.74,145.04 32.08,146.38 J2.7
P2.3: J2.8 J_OUT1.12 | length 32.1
  Bottom Layer w0.3: J_OUT1.12 23.796,141.3 23.796,141.778 24.472,142.454 26.728,142.454 27.27,141.912 27.812,142.454 30.068,142.454 30.261,142.261 33.18,145.18 37.58,145.18 38.54,146.14 J2.8
P2.4: J2.9 J_OUT1.13 | length 31.1
  Bottom Layer w0.3: J_OUT1.13 8.29,140.05 30.75,140.05 34.54,143.84 J2.9
P2.5: J2.10 J_OUT1.14 | length 33.8
  Bottom Layer w0.3: J_OUT1.14 10.94,138.76 11.28,139.1 22.978,139.1 24.472,137.606 30.068,137.606 30.078,137.616 31.58,137.616 32.688,138.724 32.688,139.697 33.5,140.509 33.5,142.017 34.033,142.55 37.25,142.55 J2.10
P2.6: J2.11 J_OUT1.15 | length 34.2
  Bottom Layer w0.3: J_OUT1.15 8.25,137.47 11.03,137.47 13.53,134.97 30.37,134.97 32.134,136.734 32.134,137.386 33.242,138.494 33.242,139.467 34.054,140.279 34.054,140.35 J2.11@35.004,141.3
  Bottom Layer w0.4: J2.11@35.004,141.3 J2.11
P2.7: J2.12 J_OUT1.16 | length 36.2
  Bottom Layer w0.3: J_OUT1.16 10.98,136.22 14.77,132.43 30.33,132.43 31,133.1 31,134.7 32.688,136.388 32.688,137.157 33.796,138.265 33.796,139.238 34.568,140.01 37.25,140.01 J2.12
P2.8: J2.13 J_OUT1.17 | length 37.9
  Bottom Layer w0.3: J_OUT1.17 8.29,134.97 11.03,134.97 16.11,129.89 30.69,129.89 31.554,130.754 31.554,134.471 33.242,136.159 33.242,136.927 34.243,137.928 34.928,137.928 J2.13@35.76,138.76
  Bottom Layer w0.4: J2.13@35.76,138.76 J2.13
P2.9: J2.14 J_OUT1.18 | length 40.4
  Bottom Layer w0.3: J_OUT1.18@9.732,133.488 10.612,133.488 16.75,127.35 31.45,127.35 32.108,128.008 32.108,134.208 33.796,135.896 33.796,136.698 34.472,137.374 37.124,137.374 J2.14@38.51,138.76
  Bottom Layer w0.4: J_OUT1.18 J_OUT1.18@9.732,133.488 ; J2.14@38.51,138.76 J2.14
P3.16: J1.60 J_OUT1.58 | length 20.3
  Top Layer w0.3: J_OUT1.58 10.88,81.54 27.76,81.54 28.54,80.76 J1.60
P3.17: J1.59 J_OUT1.55 | length 28.8
  Top Layer w0.3: J_OUT1.55 4.9,83.32 4.9,79.8 6.046,78.654 10.754,78.654 12.44,80.34 J1.59
P3.18: J1.58 J_OUT1.56 | length 20.3
  Top Layer w0.3: J_OUT1.56 11.33,85.42 12.67,84.08 27.72,84.08 28.54,83.26 J1.58
P3.19: J1.57 J_OUT1.53 | length 22.1
  Top Layer w0.3: J_OUT1.53 7,87.5 8.3,86.2 8.3,84.963 9.043,84.22 10.74,84.22 12.08,82.88 J1.57
P3.20: J1.56 J_OUT1.54 | length 20.4
  Top Layer w0.3: J_OUT1.54 9.58,88 11.25,88 12.55,86.7 27.8,86.7 28.54,85.96 J1.56
P3.21: J1.55 J_OUT1.51 | length 22.1
  Top Layer w0.3: J_OUT1.51 7,90.36 8.3,89.06 8.3,87.503 9.183,86.62 11.479,86.62 12.679,85.42 J1.55
P3.22: J1.54 J_OUT1.52 | length 20.4
  Top Layer w0.3: J_OUT1.52 11.25,90.5 12.45,89.3 27.8,89.3 28.54,88.56 J1.54
P3.23: J1.53 J_OUT1.49 | length 22.1
  Top Layer w0.3: J_OUT1.49 7,92.5 8.3,91.2 8.3,90.043 9.043,89.3 11.2,89.3 12.54,87.96 J1.53
P3.24: J1.52 J_OUT1.50 | length 20.4
  Top Layer w0.3: J_OUT1.50 11.21,93.04 12.45,91.8 27.8,91.8 28.54,91.06 J1.52
P3.25: J1.51 J_OUT1.47 | length 22.1
  Top Layer w0.3: J_OUT1.47 7,95 8.3,93.7 8.3,92.583 9.183,91.7 11.55,91.7 12.75,90.5 J1.51
P3.26: J1.50 J_OUT1.48 | length 20.4
  Top Layer w0.3: J_OUT1.48 11.42,95.58 12.7,94.3 27.8,94.3 28.54,93.56 J1.50
P3.27: J1.49 J_OUT1.45 | length 22.3
  Top Layer w0.3: J_OUT1.45 7,97.277 8.3,95.977 8.3,94.718 8.778,94.24 11.859,94.24 13.059,93.04 J1.49
P3.28: J1.48 J_OUT1.46 | length 20.3
  Top Layer w0.3: J_OUT1.46 11.13,98.12 12.45,96.8 27.72,96.8 ; 27.72,96.78 28.54,95.96 J1.48
P3.29: J1.47 J_OUT1.43 | length 22.2
  Top Layer w0.3: v1(15,95.58) J1.47
  Bottom Layer w0.3: J_OUT1.43 7,100 8.3,98.7 8.3,97.45 8.97,96.78 11.22,96.78 12.42,95.58 v1(15,95.58)
P3.30: J1.46 J_OUT1.44 | length 20.4
  Top Layer w0.3: v1(15.75,100) 16.45,99.3 28,99.3 28.54,98.76 J1.46
  Bottom Layer w0.3: J_OUT1.44 9.6,100.6 15.15,100.6 v1(15.75,100)
P3.31: J1.45 J_OUT1.41 | length 22.6
  Top Layer w0.3: v1(13.5,98) 24.75,98 24.87,98.12 J1.45
  Bottom Layer w0.3: J_OUT1.41 7,103.06 8.3,101.76 8.3,99.7 8.68,99.32 12.28,99.32 13.5,98.1 v1(13.5,98)
RESET_IN: BB2.31 BB2.32 R1.1 | length 7.5
  Top Layer w0.5: R1.1 BB2.31 BB2.32
  Bottom Layer w0.5: BB2.31 30.825,4.675 30.9,4.6 BB2.32@32.465,4.6
RESET_OUT: J1.6 J_OUT1.6 | length 20.1
  Bottom Layer w0.3: J_OUT1.6 16.546,148.92 17.766,147.7 17.781,147.715 21.715,147.715 21.72,147.72 27.42,147.72 28.54,148.84 J1.6
V3A: J1.7 J_OUT1.7 | length 22.5
  Top Layer w0.3: J_OUT1.7 8.32,147.7 8.992,147.7 ; 9.022,147.67 10.67,147.67 13.546,150.546 21.254,150.546 25.2,146.6 25.78,146.6 J1.7
  Top Layer w0.4: 8.992,147.7 9.022,147.67
VCC: BB1.1 BB1.2 | length 2.5
  Bottom Layer w0.5: BB1.1 BB1.2
VREF: J1.9
VSSA: J1.8 J_OUT1.8 | length 23.8
  Top Layer w0.3: J_OUT1.8@10.38,146.38 13.992,149.992 20.508,149.992 23.6,146.9 23.6,145.7 24.2,145.1 27.1,145.1 J1.8@28.38,146.38
  Top Layer w0.4: J_OUT1.8 J_OUT1.8@10.38,146.38 ; J1.8@28.38,146.38 J1.8
VU: BB2.1 BB2.2 | length 4.9
  Top Layer w0.5: BB2.1 BB2.2
  Bottom Layer w0.5: BB2.1 30.775,42.6 32.6,42.6 BB2.2@32.775,42.775
WAKE: PLC1.5 R5.2 | length 2.9
  Top Layer w0.4: R5.2 PLC1.5
WE: BB2.27 BB2.28 R8.1 | length 7.7
  Top Layer w0.3: R8.1 R8.1@27.42,9.755
  Top Layer w0.5: R8.1@27.42,9.755 BB2.27 BB2.28
  Bottom Layer w0.5: BB2.27 30.655,9.7 BB2.28@32.485,9.7
pads on no net: J1.10 J1.20 J1.29 J1.30 J1.31 J1.32 J1.33 J1.34 J1.37 J1.38 J1.39 J1.40 J1.41 J1.42 J1.43 J1.44 J2.27 J2.28 J2.29 J2.30 J2.31 J2.32 J2.33 J2.34 J2.42

## Polygon pours and split planes (outlines as drawn)
GND on Top Layer "GND" (solid, remove dead copper, pour order 12): 0,160 50,160 50,74.5 34,58.5 34,47.5 50,47.5 50,0 0,0
GND on Bottom Layer "GND" (solid, remove dead copper, pour order 16): 50,74.5 34,58.5 34,47.5 50,47.5 50,0 0,0 0,160 50,160

## Other copper
Top Layer:
  text "EA_to_Atlys_V0.2" at 42.926,3.556 h2 r90
Bottom Layer:
  text "E10 - Team3 - Dennis" at 41.85,3.775 h2 r270

## Text inside footprints (layer, text, board x,y; h text height)
BB1: Top Overlay "32" at 16.132,3.151 h1.27 r270; Top Overlay "31" at 13.592,3.151 h1.27 r270; Top Overlay "1" at 13.592,45.315 h1.27 r270; Top Overlay "2" at 16.132,45.315 h1.27 r270
BB2: Top Overlay "32" at 32.632,3.151 h1.27 r270; Top Overlay "31" at 30.092,3.151 h1.27 r270; Top Overlay "1" at 30.092,45.315 h1.27 r270; Top Overlay "2" at 32.632,45.315 h1.27 r270
J1: Top Overlay "64" at 28.032,73.228 h1.27 r270; Top Overlay "63" at 25.492,73.228 h1.27 r270; Top Overlay "1" at 25.492,156.54 h1.27 r270; Top Overlay "2" at 28.032,156.54 h1.27 r270
J2: Top Overlay "64" at 38.032,73.228 h1.27 r270; Top Overlay "63" at 35.492,73.228 h1.27 r270; Top Overlay "1" at 35.492,156.54 h1.27 r270; Top Overlay "2" at 38.032,156.54 h1.27 r270
J_OUT1: Top Overlay "60" at 9.032,78.308 h1.27 r270; Top Overlay "59" at 6.492,78.308 h1.27 r270; Top Overlay "1" at 6.492,156.54 h1.27 r270; Top Overlay "2" at 9.032,156.54 h1.27 r270; Bottom Overlay "1" at 6.492,209.88 h1.27 r270